# Altium PCB DC_Switch_2.PcbDoc
Units mm, origin at the board's own origin, x right, y up, seen from the top; angles counter-clockwise.
Board outline 75.01 x 101.07 mm, 2 copper layers (Top Layer, Bottom Layer); 24 components, 104 nets, 306 pads, 80 vias.
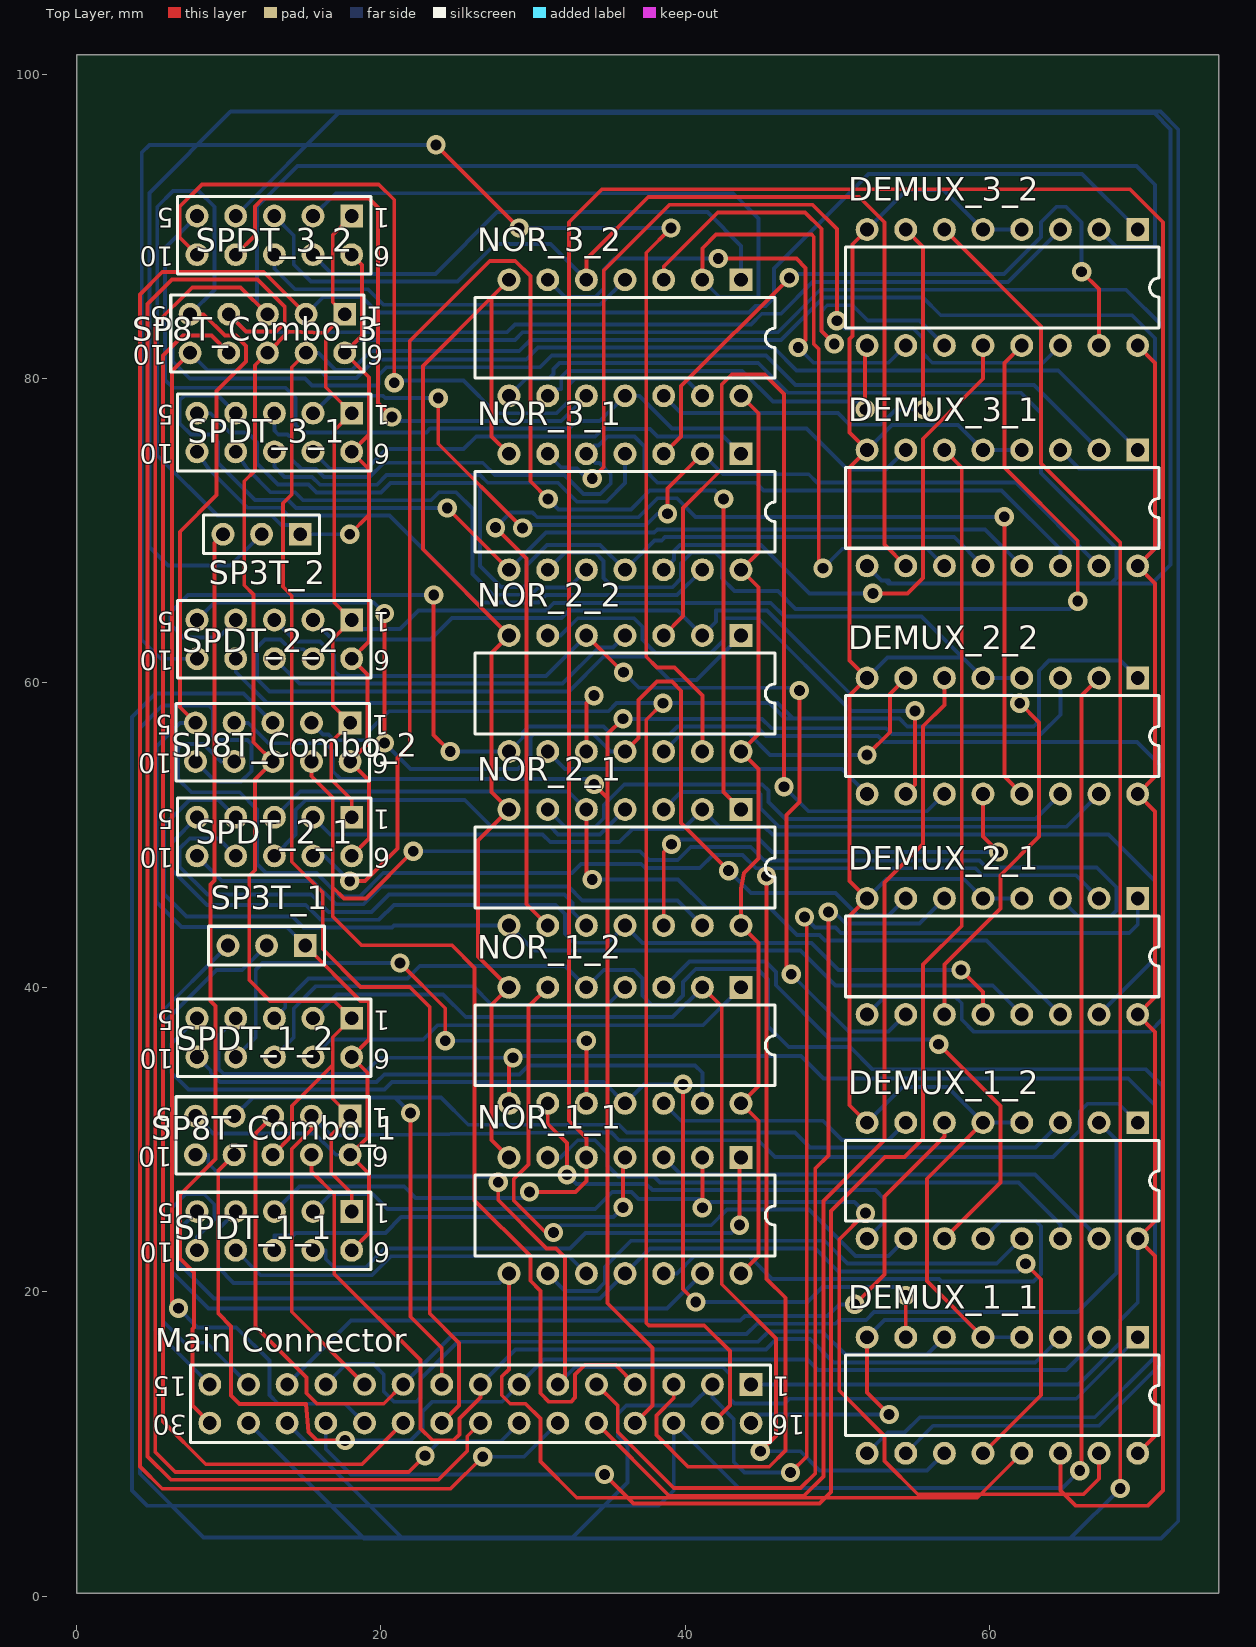
[diagram p0: Top Layer view]
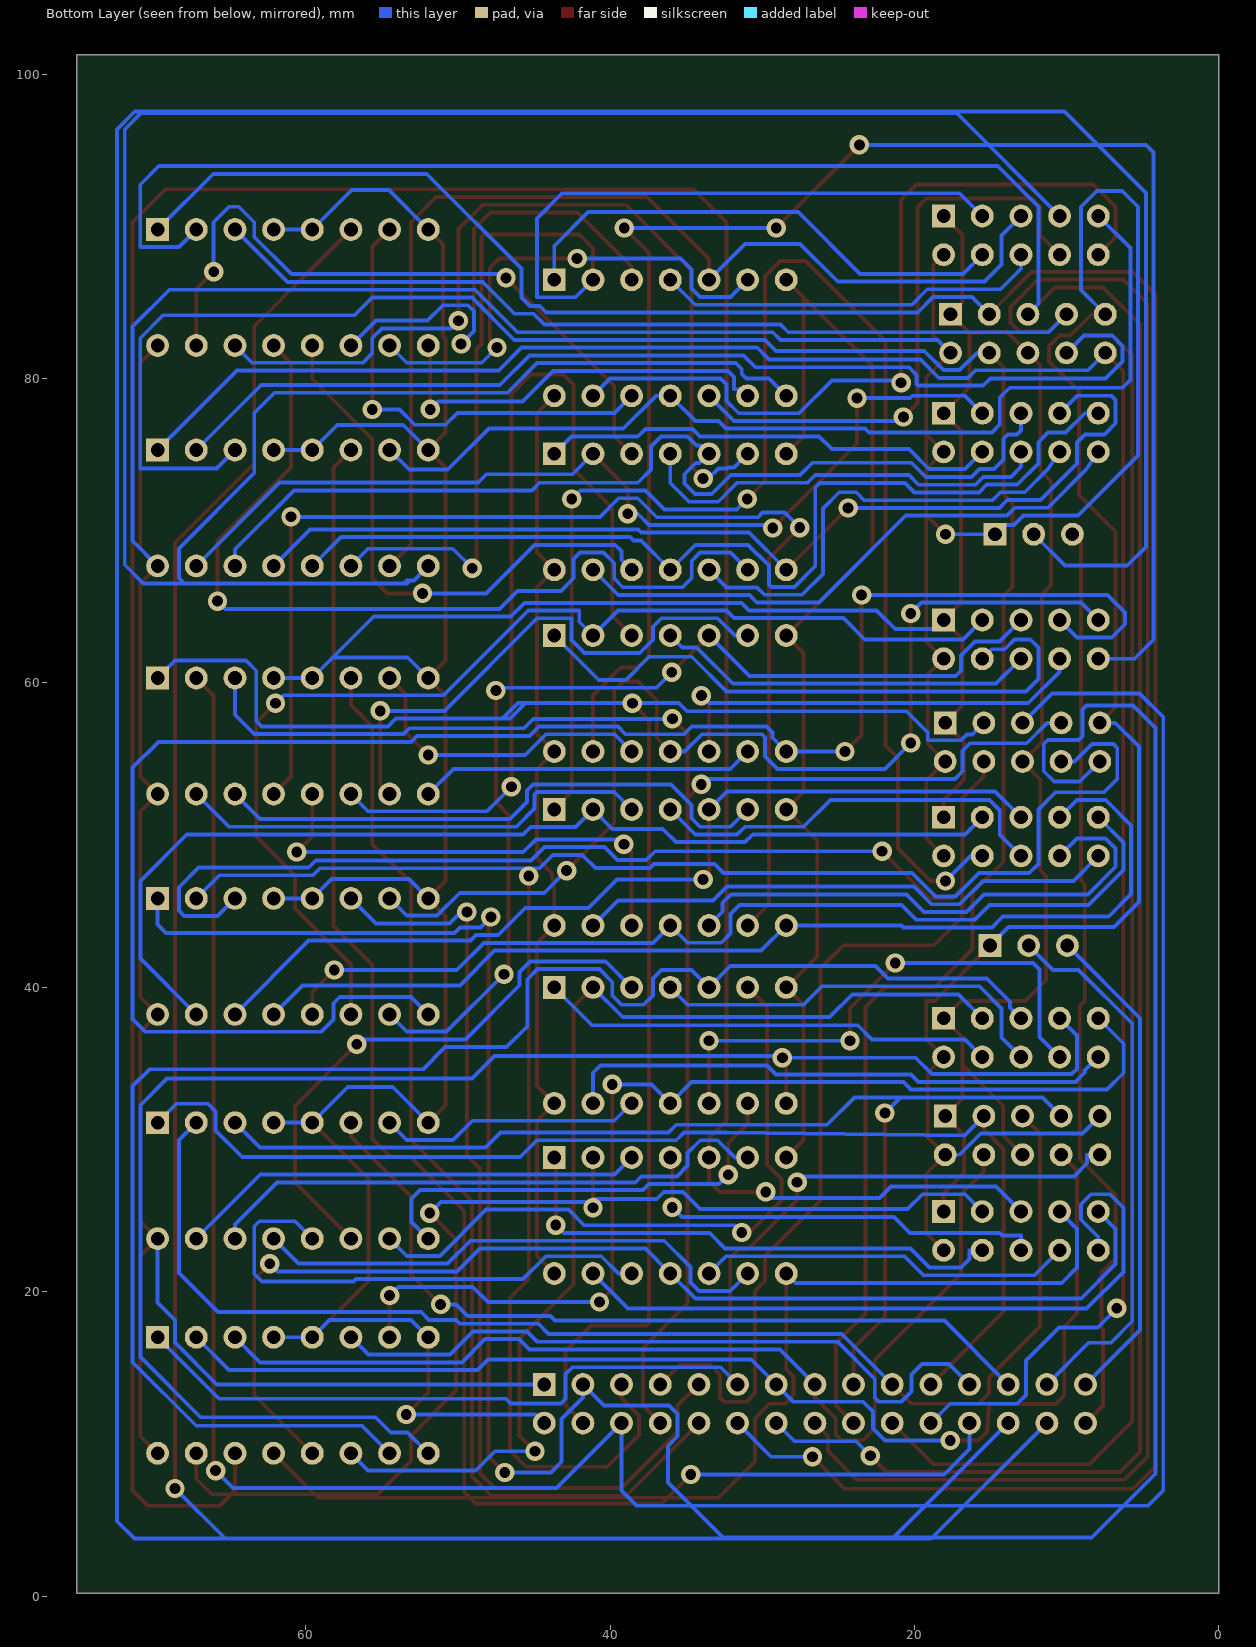
[diagram p1: Bottom Layer view, seen from below]

## Layer stack, top to bottom
Top Solder: solder mask 0.0102, Solder Resist, Dk 3.5
Top Layer: signal copper 0.0356
Dielectric 1: dielectric 0.32, FR-4, Dk 4.8
Bottom Layer: signal copper 0.0356
Bottom Solder: solder mask 0.0102, Solder Resist, Dk 3.5

## Board outline
0.025,0.203 75.032,0.203 75.032,101.27 0.025,101.27

## Design rules (kind name [scope] priority, off if disabled: settings)
Clearance [All] p1: gap=0.254
PolygonConnect [All] p1: connectstyle=Relief reliefconductorwidth=0.254 reliefentries=4 polygonreliefangle="90 Angle" airgapwidth=0.254
RoutingVias [All] p1: holewidth=0.711 width=1.27 viastyle="Through Hole" minholewidth=0.711 minwidth=1.27 maxholewidth=0.711 maxwidth=1.27
SolderMaskExpansion [All] p1: expansion=0.102
Width [All] p1: maxlimit=0.254 minlimit=0.254 preferedwidth=0.254
30 further rules are at their usual default settings.

## Components (designator, comment, footprint, x,y, rotation, side; value= is the part's Value field where it differs from the comment)
DEMUX_1_1 "CD54HCT238" J016D 60.833,13.208 r180 top
DEMUX_1_2 "CD54HCT238" J016D 60.833,27.305 r180 top
DEMUX_2_1 "CD54HCT238" J016D 60.833,42.037 r180 top
DEMUX_2_2 "CD54HCT238" J016D 60.833,56.515 r180 top
DEMUX_3_1 "CD54HCT238" J016D 60.833,71.501 r180 top
DEMUX_3_2 "CD54HCT238" J016D 60.833,85.979 r180 top
"Main Connector" "Arduino Pins" HDR2X15_CEN 44.323,13.919 r180 top
NOR_1_1 "SN74HC02N" N014 36.043,25.019 r180 top
NOR_1_2 "SN74HC02N" N014 36.043,36.195 r180 top
NOR_2_1 "SN74HC02N" N014 36.043,47.879 r180 top
NOR_2_2 "SN74HC02N" N014 36.043,59.309 r180 top
NOR_3_1 "SN74HC02N" N014 36.043,71.247 r180 top
NOR_3_2 "SN74HC02N" N014 36.043,82.677 r180 top
SP3T_1 "Cntrl" HDR1X3 15.037,42.748 r180 top
SP3T_2 "Cntrl" HDR1X3 14.707,69.774 r180 top
SP8T_Combo_1 "Cntrl" HDR2X5_CEN 17.983,31.547 r180 top
SP8T_Combo_2 "Cntrl" HDR2X5_CEN 17.983,57.379 r180 top
SP8T_Combo_3 "Cntrl" HDR2X5_CEN 17.628,84.226 r180 top
SPDT_1_1 "Cntrl" HDR2X5_CEN 18.085,25.273 r180 top
SPDT_1_2 "Cntrl" HDR2X5_CEN 18.085,37.973 r180 top
SPDT_2_1 "Cntrl" HDR2X5_CEN 18.085,51.181 r180 top
SPDT_2_2 "Cntrl" HDR2X5_CEN 18.085,64.135 r180 top
SPDT_3_1 "Cntrl" HDR2X5_CEN 18.085,77.724 r180 top
SPDT_3_2 "Cntrl" HDR2X5_CEN 18.085,90.678 r180 top

## Footprints (in the part's own frame and the unit in brackets; to place one, negate y for a bottom-side part, rotate by r counter-clockwise, add the part's x,y. Pads: shape width x height; smd on the part's side, far side on the other; paste and mask are expansions set on the pad)
HDR1X3 [mm] "Connector; Header; 3 Position"
  rect 1.5x1.5 hole 0.9: 1(0,0)
  round 1.5 hole 0.9: 2(2.54,0) 3(5.08,0)
  silkscreen extent -1.27,-1.27 6.35,1.27
HDR2X5_CEN [mm] "Connector; Header; 5x2 Position"
  rect 1.5x1.5 hole 0.9: 1(0,0)
  round 1.5 hole 0.9: 2(2.54,0) 3(5.08,0) 4(7.62,0) 5(10.16,0) 6(0,2.54) 7(2.54,2.54) 8(5.08,2.54) 9(7.62,2.54) 10(10.16,2.54)
  silkscreen extent -1.27,-1.27 11.43,3.81
HDR2X15_CEN [mm] "Connector; Header; 15x2 Position"
  rect 1.5x1.5 hole 0.9: 1(0,0)
  round 1.5 hole 0.9: 2(2.54,0) 3(5.08,0) 4(7.62,0) 5(10.16,0) 6(12.7,0) 7(15.24,0) 8(17.78,0) 9(20.32,0) 10(22.86,0) 11(25.4,0) 12(27.94,0) 13(30.48,0) 14(33.02,0) 15(35.56,0) 16(0,2.54) 17(2.54,2.54) 18(5.08,2.54) 19(7.62,2.54) 20(10.16,2.54) 21(12.7,2.54) 22(15.24,2.54) 23(17.78,2.54) 24(20.32,2.54) 25(22.86,2.54) 26(25.4,2.54) 27(27.94,2.54) 28(30.48,2.54) 29(33.02,2.54) 30(35.56,2.54)
  silkscreen extent -1.27,-1.27 36.83,3.81
J016D [mm] "DIP; 16 Leads; Row Spacing 7.62 mm; Pitch 2.54 mm"
  rect 1.5x1.5 hole 0.9: 1(-8.89,-3.81)
  round 1.5 hole 0.9: 2(-6.35,-3.81) 3(-3.81,-3.81) 4(-1.27,-3.81) 5(1.27,-3.81) 6(3.81,-3.81) 7(6.35,-3.81) 8(8.89,-3.81) 9(8.89,3.81) 10(6.35,3.81) 11(3.81,3.81) 12(1.27,3.81) 13(-1.27,3.81) 14(-3.81,3.81) 15(-6.35,3.81) 16(-8.89,3.81)
  silkscreen extent -10.3,-2.65 10.3,2.65
N014 [mm] "DIP; 14 Leads; Row Spacing 7.62 mm; Pitch 2.54 mm"
  rect 1.5x1.5 hole 0.9: 1(-7.62,-3.81)
  round 1.5 hole 0.9: 2(-5.08,-3.81) 3(-2.54,-3.81) 4(0,-3.81) 5(2.54,-3.81) 6(5.08,-3.81) 7(7.62,-3.81) 8(7.62,3.81) 9(5.08,3.81) 10(2.54,3.81) 11(0,3.81) 12(-2.54,3.81) 13(-5.08,3.81) 14(-7.62,3.81)
  silkscreen extent -9.85,-2.65 9.85,2.65

## Part data
DEMUX_1_1 DEMUX_1_2 DEMUX_2_1 DEMUX_2_2 DEMUX_3_1 DEMUX_3_2: library part SN54HC238J, "3-Line to 8-Line Decoder / Demultiplexer"
"Main Connector": library part "Header 15X2A", "Header, 15-Pin, Dual row"
NOR_1_1 NOR_1_2 NOR_2_1 NOR_2_2 NOR_3_1 NOR_3_2: "Quadruple 2-Input Positive-NOR Gate"
SP3T_1 SP3T_2: library part "Header 3", "Header, 3-Pin"
SP8T_Combo_1 SP8T_Combo_2 SP8T_Combo_3 SPDT_1_1 SPDT_1_2 SPDT_2_1 SPDT_2_2 SPDT_3_1 SPDT_3_2: library part "Header 5X2A", "Header, 5-Pin, Dual row"

## Via types
v1: diameter 1.27, hole 0.711, Top Layer to Bottom Layer, 80 vias

## Nets (pads, with @x,y where several pads share a name; then routed paths per layer and width w, separated by ;. In a path a pad name is that pad's centre, name@x,y a point inside that pad or via, vN(x,y) a via of type N, cw(c..) or ccw(c..) an arc to the next point about the centre after c; other vN are vias at no path point)
GND: NOR_1_1.7 NOR_1_2.7 NOR_2_1.7 NOR_2_2.7 NOR_3_1.7 NOR_3_2.7 | length 76.7
  Top Layer w0.254: NOR_1_1.7 27.28,29.972 27.28,38.862 NOR_1_2.7 26.391,42.037 26.391,49.657 NOR_2_1.7 27.28,52.832 27.28,61.976 NOR_2_2.7 22.758,68.783 22.758,80.823 27.28,85.344 ; NOR_3_1.7 27.28,76.2 27.28,85.344 ; NOR_3_2.7 27.28,85.344
NetDEMUX_1_1_1: "Main Connector.6" DEMUX_1_1.1 SP8T_Combo_1.10 | length 78.9
  Top Layer w0.254: v1(27.711,27.203) 27.711,26.035 30.886,22.86 31.496,22.86 32.106,22.25 32.106,14.402 31.623,13.919
  Bottom Layer w0.254: SP8T_Combo_1.10 8.661,29.007 8.661,28.448 9.525,27.584 27.33,27.584 v1(27.711,27.203) ; 31.623,13.919 32.754,15.05 42.469,15.05 42.926,14.593 42.926,12.979 43.231,12.675 46.533,12.675 46.838,12.979 65.684,12.979 DEMUX_1_1.1
NetDEMUX_1_1_2: "Main Connector.7" DEMUX_1_1.2 SP8T_Combo_1.9 | length 79.8
  Top Layer w0.254: SP8T_Combo_1.9 9.322,27.965 9.322,18.567 10.16,17.729 10.16,13.183 10.719,12.624 15.088,12.624 15.24,10.795 15.799,10.236 v1(17.653,10.236)
  Bottom Layer w0.254: v1(17.653,10.236) 21.946,10.236 22.733,11.024 22.733,12.141 23.368,12.776 27.94,12.776 29.083,13.919 30.722,15.558 48.018,15.558 48.717,14.859 65.024,14.859 DEMUX_1_1.2
NetDEMUX_1_1_3: "Main Connector.8" DEMUX_1_1.3 SP8T_Combo_1.7 | length 68.5
  Top Layer w0.254: SP8T_Combo_1.7 15.443,27.915 16.942,26.416 16.942,21.184 22.606,15.519 22.606,11.024 23.381,10.248 24.777,10.248 25.169,10.64 25.169,11.681 26.543,13.056 26.543,13.919
  Bottom Layer w0.254: 26.543,13.919 28.842,16.218 45.301,16.218 45.974,16.891 48.209,16.891 49.733,15.367 62.992,15.367 DEMUX_1_1.3
NetDEMUX_1_1_4: "Main Connector.16" DEMUX_1_1.4 DEMUX_1_1.5 DEMUX_1_1.8 DEMUX_1_2.4 DEMUX_1_2.5 DEMUX_1_2.8 DEMUX_2_1.4 DEMUX_2_1.5 DEMUX_2_1.8 DEMUX_2_2.4 DEMUX_2_2.5 DEMUX_2_2.8 DEMUX_3_1.4 DEMUX_3_1.5 DEMUX_3_1.8 DEMUX_3_2.4 DEMUX_3_2.5 DEMUX_3_2.8 SP8T_Combo_1.1 SP8T_Combo_1.8 SP8T_Combo_2.1 SP8T_Combo_2.8 SP8T_Combo_3.1 SP8T_Combo_3.8 SPDT_1_1.1 SPDT_1_2.1 SPDT_2_1.1 SPDT_2_2.1 SPDT_3_1.1 SPDT_3_2.1 | length 329.3
  Top Layer w0.254: SP8T_Combo_1.8 14.167,30.27 14.167,32.226 16.84,34.9 ; SPDT_1_1.1 18.085,26.467 16.739,27.813 16.739,30.302 SP8T_Combo_1.1 16.84,32.69 16.84,34.9 ; SPDT_2_1.1 18.085,52.324 16.739,53.67 16.739,56.134 SP8T_Combo_2.1 16.84,58.522 16.84,62.89 SPDT_2_2.1 16.942,65.278 16.942,76.581 SPDT_3_1.1 16.383,79.426 16.383,82.982 ; SPDT_3_2.1 16.84,89.433 16.84,85.014 SP8T_Combo_3.1 16.383,82.982 ; DEMUX_1_1.8 51.943,13.386 v1(53.391,11.938) ; DEMUX_1_2.8 50.8,32.258 50.8,44.704 DEMUX_2_1.8 50.8,46.99 50.8,59.182 DEMUX_2_2.8 50.8,61.468 50.8,74.168 DEMUX_3_1.8 50.8,76.454 50.8,82.608 50.978,82.786 50.978,88.824 DEMUX_3_2.8 ; DEMUX_1_1.5 55.88,20.701 55.88,27.432 DEMUX_1_2.5 ; 16.383,82.982 13.945,83.083 SP8T_Combo_3.8 11.735,80.874 11.735,73.965 11.024,73.254 11.024,66.421 11.633,65.811 11.633,56.109 SP8T_Combo_2.8 11.735,53.67 11.735,47.701 11.354,47.32 11.354,40.488 12.725,39.116 16.942,39.116 SPDT_1_2.1 16.84,36.728 16.84,34.9
  Bottom Layer w0.254: SPDT_2_2.1 18.708,64.135 18.708,63.547 21.26,63.547 22.483,64.77 30.86,64.77 31.356,65.266 45.617,65.266 46.519,64.364 55.524,64.364 58.217,61.671 ; 44.323,11.379 44.882,11.938 v1(53.391,11.938) ; DEMUX_1_1.8 53.086,18.161 58.42,18.161 DEMUX_1_1.5 DEMUX_1_1.4 ; DEMUX_1_2.8 54.278,33.45 57.228,33.45 DEMUX_1_2.5 DEMUX_1_2.4 ; DEMUX_2_1.8 53.213,47.117 58.293,47.117 DEMUX_2_1.5 DEMUX_2_1.4 ; DEMUX_2_2.8 53.289,61.671 58.217,61.671 ; DEMUX_3_1.8 53.582,76.95 57.924,76.95 DEMUX_3_1.5 DEMUX_3_1.4 ; DEMUX_3_2.8 54.534,92.38 56.972,92.38 DEMUX_3_2.5 DEMUX_3_2.4 ; DEMUX_2_2.4 DEMUX_2_2.5 58.217,61.671
NetDEMUX_1_1_6: "Main Connector.12" DEMUX_1_1.6 | length 46.6
  Bottom Layer w0.254: 16.383,13.919 17.729,15.265 19.507,15.265 20.193,14.58 20.193,13.462 20.879,12.776 22.327,12.776 22.606,13.056 22.606,14.275 25.057,16.726 44.793,16.726 45.466,17.399 48.997,17.399 50.521,15.875 55.88,15.875 DEMUX_1_1.6
NetDEMUX_1_1_7: DEMUX_1_1.7 NOR_1_2.11 SPDT_1_2.5 | length 71.5
  Top Layer w0.254: v1(39.853,33.63) 39.853,20.168 v1(40.691,19.329) ; DEMUX_1_1.7 v1(54.483,19.761)
  Bottom Layer w0.254: SPDT_1_2.5 6.248,36.297 6.248,34.392 7.354,33.286 20.232,33.286 20.728,33.782 34.646,33.782 NOR_1_2.11 37.287,33.63 v1(39.853,33.63) ; v1(40.691,19.329) 48.025,19.329 49.022,20.327 53.918,20.327 v1(54.483,19.761)
NetDEMUX_1_1_9: DEMUX_1_1.9 NOR_1_2.8 SPDT_1_2.4 | length 108.5
  Top Layer w0.254: NOR_1_2.8 28.423,35.128 v1(28.677,35.382) v1@28.778,35.484
  Bottom Layer w0.254: SPDT_1_2.4 9.334,36.842 9.334,34.646 9.677,34.302 18.859,34.302 19.939,35.382 v1(28.677,35.382) ; v1@28.778,35.484 47.6,35.484 49.073,34.011 69.101,34.011 70.854,32.258 70.854,15.711 66.904,11.76 55.408,11.76 54.408,10.76 53.305,10.76 DEMUX_1_1.9
NetDEMUX_1_1_10: DEMUX_1_1.10 NOR_1_2.5 SPDT_1_2.3 | length 106.6
  Bottom Layer w0.254: SPDT_1_2.3 13.72,38.688 13.72,39.057 15.252,40.589 21.742,40.589 22.555,41.402 32.106,41.402 NOR_1_2.5 34.646,41.148 36.627,41.148 37.186,40.589 37.186,39.472 37.795,38.862 39.243,38.862 39.853,39.472 39.853,40.361 40.691,41.199 44.755,41.199 45.441,40.513 45.441,37.44 46.8,36.08 50.839,36.08 52.299,34.62 70.256,34.62 71.362,33.515 71.362,15.379 67.184,11.201 56.286,11.201 DEMUX_1_1.10
NetDEMUX_1_1_11: DEMUX_1_1.11 NOR_1_2.2 SPDT_1_2.2 | length 73.6
  Top Layer w0.254: NOR_1_2.2 42.393,38.735 42.393,20.498 45.949,16.942 45.949,10.541 v1(44.933,9.525)
  Bottom Layer w0.254: SPDT_1_2.2 17.114,39.543 24.084,39.543 25.578,38.049 39.167,38.049 NOR_1_2.2 ; v1(44.933,9.525) 47.562,9.525 48.82,8.267 55.892,8.267 DEMUX_1_1.11
NetDEMUX_1_1_12: DEMUX_1_1.12 NOR_1_1.11 SPDT_1_1.5 | length 77.1
  Top Layer w0.254: DEMUX_1_1.12 63.373,13.208 63.373,20.828 v1(62.357,21.844)
  Bottom Layer w0.254: SPDT_1_1.5 6.782,24.13 6.782,21.819 9.042,19.558 34.392,19.558 NOR_1_1.11 37.682,22.848 48.551,22.848 50.051,21.348 61.861,21.348 v1(62.357,21.844)
NetDEMUX_1_1_13: DEMUX_1_1.13 NOR_1_1.8 SPDT_1_1.4 | length 71.9
  Top Layer w0.254: NOR_1_1.8 28.423,14.91 27.94,14.427 27.94,13.208 28.499,12.649 29.515,12.649 30.48,11.684 30.48,8.865 32.868,6.477 59.182,6.477 DEMUX_1_1.13
  Bottom Layer w0.254: SPDT_1_1.4 9.322,24.13 9.322,21.59 10.326,20.586 27.8,20.586 NOR_1_1.8
NetDEMUX_1_1_14: DEMUX_1_1.14 NOR_1_1.5 SPDT_1_1.3 | length 219.5
  Top Layer w0.254: v1(29.769,26.568) 32.791,26.568 33.503,27.28 NOR_1_1.5 33.503,30.099 32.36,31.242 32.36,90.272 34.526,92.438 69.208,92.438 71.374,90.272 71.374,6.96 70.358,5.944 65.659,5.944 64.643,6.96 DEMUX_1_1.14
  Bottom Layer w0.254: SPDT_1_1.3 14.656,26.924 21.539,26.924 22.285,26.178 29.378,26.178 v1(29.769,26.568)
NetDEMUX_1_1_15: DEMUX_1_1.15 NOR_1_1.2 SPDT_1_1.2 | length 77.5
  Top Layer w0.254: v1(41.123,25.527) NOR_1_1.2 ; v1(51.841,25.171) 50.114,23.444 50.114,13.513 53.086,10.541 53.086,8.89 55.27,6.706 66.167,6.706 67.183,7.722 DEMUX_1_1.15
  Bottom Layer w0.254: SPDT_1_1.2 16.688,26.416 19.482,26.416 20.447,25.451 34.087,25.451 35.204,26.568 36.474,26.568 36.932,26.111 41.123,26.111 v1(41.123,25.527) 41.504,25.908 51.105,25.908 v1(51.841,25.171)
NetDEMUX_1_1_16: "Main Connector.1" DEMUX_1_1.16 DEMUX_1_2.16 DEMUX_2_1.16 DEMUX_2_2.16 DEMUX_3_1.16 DEMUX_3_2.16 SP3T_1.1 SP3T_2.1 SP8T_Combo_1.5 SP8T_Combo_1.6 SP8T_Combo_2.5 SP8T_Combo_2.6 SP8T_Combo_3.5 SP8T_Combo_3.6 SPDT_1_1.6 SPDT_1_2.6 SPDT_2_1.6 SPDT_2_2.6 SPDT_3_1.6 SPDT_3_2.6 | length 366.5
  Top Layer w0.254: SP8T_Combo_3.5 8.357,84.226 9.766,82.817 10.477,82.817 11.151,82.144 11.151,81.128 9.195,79.172 9.195,72.339 6.794,69.938 6.794,58.408 SP8T_Combo_2.5 ; SP3T_1.1 18.669,39.116 19.228,39.116 19.228,36.576 SPDT_1_2.6 19.126,34.392 19.126,30.15 SP8T_Combo_1.6 19.228,27.762 19.228,23.876 SPDT_1_1.6 ; v1(17.958,69.774) 19.228,71.044 ; SPDT_2_1.6 19.228,49.784 19.228,53.594 SP8T_Combo_2.6 19.126,55.982 19.126,60.554 SPDT_2_2.6 19.228,62.738 19.228,71.044 ; SPDT_3_2.6 18.771,87.452 18.771,82.829 SP8T_Combo_3.6 19.228,80.086 19.228,76.327 ; DEMUX_1_1.16 70.866,10.541 70.866,22.352 DEMUX_1_2.16 70.866,24.638 70.866,37.084 DEMUX_2_1.16 70.866,39.37 70.866,51.562 DEMUX_2_2.16 70.866,53.848 70.866,66.548 DEMUX_3_1.16 70.866,68.834 70.866,81.026 DEMUX_3_2.16 ; 19.228,71.044 19.228,74.041 ; 19.228,74.041 19.228,76.327 ; 19.228,74.041 SPDT_3_1.6 19.228,76.327
  Bottom Layer w0.254: SP8T_Combo_3.5 9.068,85.827 9.068,91.288 8.026,92.329 6.35,92.329 5.309,91.288 5.309,74.955 9.259,71.005 12.834,71.005 13.456,70.383 14.097,70.383 SP3T_2.1 v1(17.958,69.774) ; SP8T_Combo_1.5 8.966,30.404 15.646,30.404 17.043,29.007 SP8T_Combo_1.6 ; SP8T_Combo_2.5 6.807,57.379 5.258,55.829 5.258,45.604 6.894,43.967 13.818,43.967 SP3T_1.1 ; SP8T_Combo_3.6 18.479,82.538 28.804,82.538 29.312,83.046 46.08,83.046 48.867,85.834 68.954,85.834 71.374,83.414 71.374,69.342 DEMUX_3_1.16 ; 44.323,13.919 65.837,13.919 68.58,16.662 68.58,18.161 69.723,19.304 DEMUX_1_2.16
NetDEMUX_1_2_1: "Main Connector.11" DEMUX_1_2.1 SP8T_Combo_1.2 | length 78.3
  Top Layer w0.254: SP8T_Combo_1.2 15.443,30.683 14.148,29.388 14.148,18.694 18.923,13.919
  Bottom Layer w0.254: SP8T_Combo_1.2 16.713,30.277 32.372,30.468 35.142,30.468 35.65,29.96 44.794,29.96 45.899,28.854 64.16,28.854 65.913,30.607 65.913,31.852 66.421,32.36 68.478,32.36 DEMUX_1_2.1
NetDEMUX_1_2_2: "Main Connector.10" DEMUX_1_2.2 SP8T_Combo_1.3 | length 87.5
  Top Layer w0.254: SP8T_Combo_1.3 11.76,30.404 11.76,17.729 15.113,14.376 15.113,13.335 15.799,12.649 20.193,12.649 21.463,13.919
  Bottom Layer w0.254: 21.463,13.919 24.778,17.234 44.031,17.234 44.704,17.907 49.86,17.907 50.114,18.161 51.892,18.161 52.4,18.669 65.761,18.669 68.326,21.234 68.326,29.972 DEMUX_1_2.2
NetDEMUX_1_2_3: "Main Connector.9" DEMUX_1_2.3 SP8T_Combo_1.4 | length 77
  Top Layer w0.254: v1(21.946,31.75) 21.946,18.364 24.003,16.307 24.003,13.919
  Bottom Layer w0.254: SP8T_Combo_1.4 11.594,32.778 20.918,32.778 ; v1(21.946,31.75) 20.918,32.778 ; DEMUX_1_2.3 63.004,29.476 48.188,29.476 47.196,30.468 36.158,30.468 35.65,30.976 25.742,30.976 23.94,32.778 20.918,32.778
NetDEMUX_1_2_6: "Main Connector.13" DEMUX_1_2.6 | length 53.8
  Top Layer w0.254: v1(51.13,19.177) 53.086,21.133 53.086,26.276 57.023,30.213 DEMUX_1_2.6
  Bottom Layer w0.254: 13.843,13.919 18.034,18.11 43.612,18.11 43.917,18.415 49.352,18.415 50.114,19.177 v1(51.13,19.177)
NetDEMUX_1_2_7: DEMUX_1_2.7 NOR_1_2.12 | length 17.4
  Bottom Layer w0.254: NOR_1_2.12 39.726,31.242 49.047,31.242 50.305,29.984 53.352,29.984 DEMUX_1_2.7
NetDEMUX_1_2_9: DEMUX_1_2.9 NOR_1_2.9 | length 29.8
  Top Layer w0.254: NOR_1_2.9 30.963,31.039 32.233,29.769 v1(32.233,27.698)
  Bottom Layer w0.254: v1(32.233,27.698) 32.854,27.076 37.44,27.076 37.834,26.682 52.493,26.682 53.035,26.14 53.035,24.587 DEMUX_1_2.9
NetDEMUX_1_2_10: DEMUX_1_2.10 NOR_1_2.6 | length 43.9
  Top Layer w0.254: NOR_1_2.6 29.693,38.735 29.693,28.372 28.727,27.407 28.727,26.01 30.836,23.901 v1(31.344,23.901)
  Bottom Layer w0.254: v1(31.344,23.901) 31.814,24.372 41.707,24.372 42.735,25.4 48.138,25.4 51.174,22.364 53.352,22.364 DEMUX_1_2.10
NetDEMUX_1_2_11: DEMUX_1_2.11 NOR_1_2.3 | length 37.5
  Top Layer w0.254: v1(56.642,36.271) 60.706,32.207 60.706,27.178 DEMUX_1_2.11
  Bottom Layer w0.254: NOR_1_2.3 40.284,41.707 45.263,41.707 45.949,41.021 45.949,40.142 49.502,36.588 56.325,36.588 v1(56.642,36.271)
NetDEMUX_1_2_12: DEMUX_1_2.12 NOR_1_1.12 | length 33.7
  Bottom Layer w0.254: NOR_1_1.12 39.446,21.209 40.577,22.34 44.208,22.34 45.708,20.84 56.681,20.84 56.845,20.676 62.865,20.676 63.373,21.184 63.373,24.308 63.043,24.638 60.706,24.638 DEMUX_1_2.12
NetDEMUX_1_2_13: DEMUX_1_2.13 NOR_1_1.9 | length 34.9
  Bottom Layer w0.254: NOR_1_1.9 32.106,20.066 34.163,20.066 34.709,20.612 34.709,21.628 36.437,23.356 49.166,23.356 50.666,21.856 60.464,21.856 DEMUX_1_2.13
NetDEMUX_1_2_14: DEMUX_1_2.14 NOR_1_1.6 | length 37.9
  Bottom Layer w0.254: NOR_1_1.6 31.801,28.829 32.932,29.96 34.073,29.96 34.9,29.134 34.9,28.296 35.611,27.584 37.948,27.584 38.342,27.19 61.888,27.19 64.643,24.435 DEMUX_1_2.14
NetDEMUX_1_2_15: DEMUX_1_2.15 NOR_1_1.3 | length 30.8
  Bottom Layer w0.254: NOR_1_1.3 39.714,27.698 62.98,27.698 DEMUX_1_2.15
NetDEMUX_2_1_1: "Main Connector.2" DEMUX_2_1.1 SP8T_Combo_2.10 | length 183.3
  Top Layer w0.254: v1(46.914,8.128) 47.981,9.195 47.981,44.475 v1(47.828,44.628)
  Bottom Layer w0.254: SP8T_Combo_2.10 9.144,53.518 10.82,53.518 11.506,54.204 11.506,55.982 11.24,56.248 9.22,56.248 8.966,56.502 8.966,58.268 8.712,58.522 5.639,58.522 4.166,57.048 4.166,8.052 8.357,3.861 32.588,3.861 36.195,7.468 36.195,9.881 35.56,10.516 35.56,11.963 36.119,12.522 40.386,12.522 41.783,13.919 41.783,13.056 43.18,11.659 43.18,8.839 43.891,8.128 v1(46.914,8.128) ; v1(47.828,44.628) 48.514,43.942 49.86,43.942 50.216,43.586 69.164,43.586 69.723,44.145 DEMUX_2_1.1
NetDEMUX_2_1_2: "Main Connector.3" DEMUX_2_1.2 SP8T_Combo_2.9 | length 127.2
  Top Layer w0.254: 39.243,13.919 39.243,13.03 38.1,11.887 38.1,10.592 40.183,8.509 45.517,8.509 46.584,9.576 46.584,19.609 45.339,20.853 v1(45.339,47.32)
  Bottom Layer w0.254: SP8T_Combo_2.9 9.486,54.839 8.343,55.982 6.934,55.982 6.68,55.728 6.68,53.696 7.556,52.82 10.731,52.82 11.862,51.689 11.862,48.108 12.459,47.51 15.761,47.51 17.297,45.974 18.618,45.974 20.154,47.51 32.549,47.51 33.147,48.108 37.108,48.108 37.378,47.838 40.952,47.838 41.825,48.711 43.762,48.711 44.644,47.828 45.847,47.828 ; v1(45.339,47.32) 45.847,47.828 ; DEMUX_2_1.2 65.659,47.371 59.512,47.371 59.055,47.828 45.847,47.828
NetDEMUX_2_1_3: "Main Connector.4" DEMUX_2_1.3 SP8T_Combo_2.7 | length 120.7
  Top Layer w0.254: SP8T_Combo_2.7 15.443,53.873 16.84,52.476 16.84,46.584 ; v1(22.123,48.946) 19.025,45.847 17.577,45.847 16.84,46.584 ; 36.703,13.919 35.408,15.215 33.401,15.215 32.766,14.58 32.766,13.056 32.487,12.776 31.039,12.776 30.48,13.335 30.48,20.066 29.82,20.726 29.82,22.352 26.162,26.01 26.162,41.275 24.663,42.774 18.72,42.774 16.84,44.653 16.84,46.584
  Bottom Layer w0.254: v1(22.123,48.946) 37.033,48.946 37.617,48.362 39.504,48.362 40.361,49.219 44.304,49.219 45.187,48.336 59.334,48.336 59.792,47.879 67.031,47.879 68.326,46.584 68.326,45.06 67.97,44.704 65.786,44.704 DEMUX_2_1.3
NetDEMUX_2_1_6: "Main Connector.5" DEMUX_2_1.6 | length 64.5
  Top Layer w0.254: 34.163,13.919 35.56,12.522 35.56,10.795 39.243,7.112 47.574,7.112 48.539,8.077 48.539,28.092 49.403,28.956 v1(49.403,44.958)
  Bottom Layer w0.254: v1(49.403,44.958) 49.79,44.958 50.54,44.208 55.384,44.208 DEMUX_2_1.6
NetDEMUX_2_1_7: DEMUX_2_1.7 NOR_2_2.11 SPDT_2_2.5 | length 74
  Top Layer w0.254: v1(20.244,56.058) v1(20.244,64.567) ; NOR_2_2.11 36.932,56.388 36.932,58.877 38.151,60.096 39.116,60.096 39.726,59.487 39.726,50.8 v1(42.85,47.676)
  Bottom Layer w0.254: SPDT_2_2.5 9.068,65.278 19.533,65.278 v1(20.244,64.567) ; v1(20.244,56.058) 21.946,54.356 29.007,54.356 29.832,55.181 29.832,56.439 30.023,56.63 33.971,56.63 35.102,55.499 NOR_2_2.11 ; v1(42.85,47.676) 44.323,46.203 49.872,46.203 51.359,44.716 53.352,44.716 DEMUX_2_1.7
NetDEMUX_2_1_9: DEMUX_2_1.9 NOR_2_2.8 SPDT_2_2.4 | length 122
  Top Layer w0.254: v1(23.47,65.786) 23.47,56.591 v1(24.562,55.499)
  Bottom Layer w0.254: SPDT_2_2.4 9.322,62.992 7.036,62.992 6.172,63.856 6.172,64.631 7.327,65.786 v1(23.47,65.786) ; v1(24.562,55.499) NOR_2_2.8 29.324,56.4 29.324,56.744 29.718,57.138 34.634,57.138 35.142,56.63 38.976,56.63 39.484,57.138 44.685,57.138 45.302,56.522 52.673,56.522 53.061,56.134 69.672,56.134 71.362,54.444 71.362,37.936 70.51,37.084 58.979,37.084 58.166,37.897 58.166,38.964 57.76,39.37 53.086,39.37 DEMUX_2_1.9
NetDEMUX_2_1_10: DEMUX_2_1.10 NOR_2_2.5 SPDT_2_2.3 | length 67.9
  Top Layer w0.254: NOR_2_2.5 35.916,60.706 v1(35.941,60.706) ; v1(46.965,40.869) 46.66,41.173 46.66,51.333 47.498,52.172 v1(47.498,59.512)
  Bottom Layer w0.254: SPDT_2_2.3 14.414,62.726 16.013,62.726 16.942,61.798 16.942,60.808 17.285,60.464 30.848,60.464 NOR_2_2.5 ; v1(35.941,60.706) 36.957,59.69 47.32,59.69 v1(47.498,59.512) ; v1(46.965,40.869) 50.737,37.096 53.352,37.096 DEMUX_2_1.10
NetDEMUX_2_1_11: DEMUX_2_1.11 NOR_2_2.2 SPDT_2_2.2 | length 75.6
  Top Layer w0.254: DEMUX_2_1.11 57.023,41.504 60.706,45.187 60.706,47.371 63.246,49.911 63.246,57.404 v1(61.976,58.674)
  Bottom Layer w0.254: SPDT_2_2.2 16.815,62.865 23.266,62.865 24.663,64.262 31.864,64.262 32.36,64.758 39.484,64.758 NOR_2_2.2 42.024,64.02 42.024,64.758 45.376,64.758 50.94,59.194 61.456,59.194 v1(61.976,58.674)
NetDEMUX_2_1_12: DEMUX_2_1.12 NOR_2_1.11 SPDT_2_1.5 | length 64.7
  Top Layer w0.254: v1(58.115,41.148) 59.563,39.7 DEMUX_2_1.12
  Bottom Layer w0.254: SPDT_2_1.5 6.274,49.53 6.274,47.713 8.571,45.415 15.062,45.415 16.027,44.45 19.888,44.45 20.853,45.415 31.493,45.415 32.094,44.815 32.094,43.536 32.691,42.938 34.912,42.938 NOR_2_1.11 37.186,42.926 48.291,42.926 50.069,41.148 v1(58.115,41.148)
NetDEMUX_2_1_13: DEMUX_2_1.13 NOR_2_1.8 SPDT_2_1.4 | length 70.1
  Bottom Layer w0.254: SPDT_2_1.4 9.334,52.312 7.43,52.312 5.766,50.648 5.766,46.126 7.239,44.653 14.199,44.653 14.91,43.942 20.726,43.942 20.853,44.069 NOR_2_1.8 30.074,42.418 47.582,42.418 49.868,40.132 60.198,40.132 DEMUX_2_1.13
NetDEMUX_2_1_14: DEMUX_2_1.14 NOR_2_1.5 SPDT_2_1.3 | length 60.9
  Top Layer w0.254: NOR_2_1.5 33.503,47.473 v1(33.884,47.092)
  Bottom Layer w0.254: SPDT_2_1.3 14.707,52.883 32.309,52.883 NOR_2_1.5 ; v1(33.884,47.092) 39.532,47.092 41.411,45.212 45.568,45.212 47.346,43.434 48.812,43.434 49.174,43.071 59.799,43.071 DEMUX_2_1.14
NetDEMUX_2_1_15: DEMUX_2_1.15 NOR_2_1.2 SPDT_2_1.2 | length 69.1
  Bottom Layer w0.254: SPDT_2_1.2 16.676,50.05 30.621,50.05 31.129,49.542 35.662,49.542 36.539,50.419 39.853,50.419 NOR_2_1.2 42.266,50.546 45.212,50.546 45.72,50.038 67.806,50.038 70.854,46.99 70.854,41.898 DEMUX_2_1.15
NetDEMUX_2_2_1: "Main Connector.17" DEMUX_2_2.1 SP8T_Combo_2.2 | length 115.5
  Top Layer w0.254: v1(38.532,58.674) 37.44,57.582 37.44,17.958 37.617,17.78 41.25,17.78 42.926,16.104 42.926,12.522 41.783,11.379
  Bottom Layer w0.254: SP8T_Combo_2.2 16.205,56.617 16.561,56.617 16.942,56.236 19.126,56.236 19.126,56.744 20.523,58.141 34.95,58.141 35.484,58.674 v1(38.532,58.674) 45.542,58.674 ; DEMUX_2_2.1 68.58,61.468 63.906,61.468 63.246,60.808 63.246,57.506 62.89,57.15 54.585,57.15 54.077,57.658 47.066,57.658 ; 45.542,58.674 46.05,58.674 47.066,57.658 ; 45.542,58.674 46.558,57.658 47.066,57.658
NetDEMUX_2_2_2: "Main Connector.18" DEMUX_2_2.2 SP8T_Combo_2.3 | length 183.8
  Top Layer w0.254: v1(65.913,8.255) 66.04,8.382 66.04,59.182 DEMUX_2_2.2
  Bottom Layer w0.254: SP8T_Combo_2.3 10.973,59.309 5.207,59.309 3.658,57.76 3.658,6.96 4.674,5.944 38.227,5.944 39.243,6.96 39.243,11.379 43.51,7.112 64.77,7.112 v1(65.913,8.255)
NetDEMUX_2_2_3: "Main Connector.19" DEMUX_2_2.3 SP8T_Combo_2.4 | length 107.8
  Top Layer w0.254: v1(34.011,53.34) 34.9,52.451 ; v1(35.904,57.646) 34.9,56.642 34.9,52.451 ; 36.703,11.379 37.846,12.522 37.846,16.307 34.9,19.253 34.9,52.451
  Bottom Layer w0.254: SP8T_Combo_2.4 11.287,57.379 12.622,56.044 16.344,56.044 16.84,55.548 16.84,54.204 17.348,53.696 33.655,53.696 v1(34.011,53.34) ; v1(35.904,57.646) 45.046,57.646 45.663,57.03 53.181,57.03 53.569,56.642 63.373,56.642 64.643,57.912 DEMUX_2_2.3
NetDEMUX_2_2_6: "Main Connector.20" DEMUX_2_2.6 | length 73.2
  Top Layer w0.254: 34.163,11.379 38.938,6.604 47.803,6.604 49.073,7.874 49.073,25.959 53.086,29.972 53.086,46.888 55.626,49.428 55.626,57.162 57.023,58.559 DEMUX_2_2.6
NetDEMUX_2_2_7: DEMUX_2_2.7 NOR_2_2.12 | length 20.5
  Top Layer w0.254: v1(51.943,55.27) 53.441,56.768 53.441,59.283 DEMUX_2_2.7
  Bottom Layer w0.254: NOR_2_2.12 39.714,56.63 44.208,56.63 45.568,55.27 v1(51.943,55.27)
NetDEMUX_2_2_9: DEMUX_2_2.9 NOR_2_2.9 | length 22.1
  Bottom Layer w0.254: NOR_2_2.9 32.106,54.356 50.292,54.356 DEMUX_2_2.9
NetDEMUX_2_2_10: DEMUX_2_2.10 NOR_2_2.6 | length 36
  Top Layer w0.254: DEMUX_2_2.10 55.093,53.315 v1(55.093,58.166)
  Bottom Layer w0.254: NOR_2_2.6 31.801,63.119 32.932,64.25 36.627,64.25 37.186,63.691 37.186,62.84 38.049,61.976 41.681,61.976 42.532,62.826 42.532,64.25 44.794,64.25 50.878,58.166 v1(55.093,58.166)
NetDEMUX_2_2_11: DEMUX_2_2.11 NOR_2_2.3 | length 60.4
  Top Layer w0.254: NOR_2_2.3 39.853,64.389 39.853,71.501 42.393,74.041 42.393,79.604 43.053,80.264 45.212,80.264 46.482,78.994 v1(46.482,53.188)
  Bottom Layer w0.254: v1(46.482,53.188) 48.096,51.574 55.892,51.574 DEMUX_2_2.11
NetDEMUX_2_2_12: DEMUX_2_2.12 NOR_2_1.12 | length 31.7
  Top Layer w0.254: NOR_2_1.12 38.583,48.895 v1(39.091,49.403) ; DEMUX_2_2.12 59.563,49.911 v1(60.579,48.895)
  Bottom Layer w0.254: v1(39.091,49.403) 39.414,49.727 44.873,49.727 45.704,48.895 v1(60.579,48.895)
NetDEMUX_2_2_13: DEMUX_2_2.13 NOR_2_1.9 | length 81.2
  Top Layer w0.254: v1(27.534,70.206) 29.566,68.174 29.566,45.466 NOR_2_1.9 ; v1(60.96,70.917) 60.96,53.848 DEMUX_2_2.13
  Bottom Layer w0.254: v1(27.534,70.206) 28.524,71.196 29.972,71.196 30.277,70.891 36.932,70.891 38.176,72.136 39.446,72.136 40.665,70.917 v1(60.96,70.917)
NetDEMUX_2_2_14: DEMUX_2_2.14 NOR_2_1.6 | length 37.9
  Bottom Layer w0.254: NOR_2_1.6 32.094,50.558 34.087,50.558 34.646,51.117 34.646,51.993 35.993,53.34 45.06,53.34 45.466,52.934 45.466,52.184 46.584,51.066 63.004,51.066 DEMUX_2_2.14
NetDEMUX_2_2_15: DEMUX_2_2.15 NOR_2_1.3 | length 31.5
  Bottom Layer w0.254: NOR_2_1.3 39.726,52.832 44.806,52.832 44.958,52.68 44.958,51.746 46.146,50.558 65.036,50.558 DEMUX_2_2.15
NetDEMUX_3_1_1: "Main Connector.26" DEMUX_3_1.1 SP8T_Combo_3.10 | length 146.6
  Top Layer w0.254: v1(6.706,18.923) 6.286,19.343 6.286,80.505 SP8T_Combo_3.10
  Bottom Layer w0.254: v1(6.706,18.923) 7.962,17.667 10.502,17.667 12.675,15.494 12.675,13.233 13.259,12.649 17.653,12.649 18.923,11.379 ; SP8T_Combo_3.10 8.611,80.543 15.989,80.543 16.485,80.047 18.402,80.047 19.609,81.255 29.552,81.255 30.328,82.03 45.81,82.03 47.31,80.53 64.504,80.53 DEMUX_3_1.1
NetDEMUX_3_1_2: "Main Connector.25" DEMUX_3_1.2 SP8T_Combo_3.9 | length 164.1
  Top Layer w0.254: SP8T_Combo_3.9 8.865,82.829 7.01,82.829 5.69,81.509 5.69,11.481 8.499,8.672 18.756,8.672 21.463,11.379
  Bottom Layer w0.254: SP8T_Combo_3.9 8.865,82.829 7.01,82.829 6.325,82.144 6.325,81.128 7.442,80.01 15.01,80.01 15.481,79.539 19.775,79.539 19.863,79.628 19.863,80.239 20.371,80.747 30.455,80.747 31.23,81.522 45.302,81.522 47.245,79.578 62.916,79.578 DEMUX_3_1.2
NetDEMUX_3_1_3: "Main Connector.24" DEMUX_3_1.3 SP8T_Combo_3.7 | length 152.7
  Top Layer w0.254: SP8T_Combo_3.7 14.148,80.747 14.148,72.39 13.564,71.806 13.564,66.319 14.148,65.735 14.148,48.26 16.18,46.228 16.18,42.52 18.669,40.03 21.895,40.03 23.216,38.71 23.216,18.567 25.146,16.637 25.146,12.522 24.003,11.379
  Bottom Layer w0.254: SP8T_Combo_3.7 15.9,81.686 17.031,80.555 18.102,80.555 19.355,81.808 29.09,81.808 29.82,82.538 46.292,82.538 49.079,85.326 55.62,85.326 56.786,84.16 69.357,84.16 70.866,82.652 70.866,74.092 65.862,74.092 DEMUX_3_1.3
NetDEMUX_3_1_6: "Main Connector.27" DEMUX_3_1.6 | length 109.9
  Top Layer w0.254: v1(34.696,8.001) 36.601,6.096 48.819,6.096 49.581,6.858 49.581,25.324 53.111,28.854 54.407,28.854 55.626,30.074 55.626,41.504 58.166,44.044 58.166,74.168 DEMUX_3_1.6
  Bottom Layer w0.254: 16.383,11.379 16.383,9.664 18.046,8.001 v1(34.696,8.001)
NetDEMUX_3_1_7: DEMUX_3_1.7 NOR_3_2.11 SPDT_3_2.5 | length 66.3
  Bottom Layer w0.254: SPDT_3_2.5 5.817,88.57 5.817,79.908 6.325,79.4 13.741,79.4 14.402,78.74 14.402,76.962 14.91,76.454 22.987,76.454 23.241,76.708 32.372,76.708 32.868,77.204 34.38,77.204 NOR_3_2.11 36.983,78.867 39.13,76.72 47.954,76.72 50.658,74.016 53.188,74.016 DEMUX_3_1.7
NetDEMUX_3_1_9: DEMUX_3_1.9 NOR_3_2.8 SPDT_3_2.4 | length 165.4
  Bottom Layer w0.254: SPDT_3_2.4 17.221,97.434 70.815,97.434 71.882,96.368 71.882,67.767 70.663,66.548 67.97,66.548 ; NOR_3_2.8 29.554,79.998 31.042,79.998 31.344,80.3 31.344,80.62 31.738,81.014 44.794,81.014 46.737,79.07 62.052,79.07 63.373,77.749 63.373,73.787 68.326,68.834 68.326,66.904 67.97,66.548 ; DEMUX_3_1.9 52.892,66.743 53.146,66.743 ; 53.146,66.743 53.34,66.743 53.535,66.548 ; 53.146,66.743 53.34,66.548 53.535,66.548 ; 53.535,66.548 67.97,66.548
NetDEMUX_3_1_10: DEMUX_3_1.10 NOR_3_2.5 SPDT_3_2.3 | length 71.9
  Top Layer w0.254: NOR_3_2.5 33.503,87.867 37.566,91.93 51.428,91.93 53.086,90.272 53.086,69.088 DEMUX_3_1.10
  Bottom Layer w0.254: SPDT_3_2.3 14.275,89.408 14.275,87.503 15.404,86.373 25.042,86.373 27.518,88.849 31.14,88.849 NOR_3_2.5
NetDEMUX_3_1_11: DEMUX_3_1.11 NOR_3_2.2 SPDT_3_2.2 | length 80.7
  Top Layer w0.254: NOR_3_2.2 41.123,88.558 42.023,89.458 48.294,89.458 48.437,89.315 48.437,82.278 48.768,81.947 48.768,67.818 v1(49.047,67.539)
  Bottom Layer w0.254: SPDT_3_2.2 17.043,92.177 43.155,92.177 44.806,90.526 44.806,85.344 42.266,85.344 NOR_3_2.2 ; v1(49.047,67.539) 50.331,68.822 55.892,68.822 DEMUX_3_1.11
NetDEMUX_3_1_12: DEMUX_3_1.12 NOR_3_1.11 SPDT_3_1.5 | length 65
  Bottom Layer w0.254: SPDT_3_1.5 8.802,77.724 10.072,76.454 11.227,76.454 11.862,75.819 11.862,74.422 13.247,73.037 15.251,73.037 15.771,72.517 20.001,72.517 20.629,73.145 26.213,73.145 26.518,72.84 26.518,67.678 27.889,66.306 29.4,66.306 29.566,66.472 29.566,67.716 30.925,69.076 34.404,69.076 NOR_3_1.11 37.973,69.367 38.456,69.367 38.672,69.584 57.67,69.584 DEMUX_3_1.12
NetDEMUX_3_1_13: DEMUX_3_1.13 NOR_3_1.8 SPDT_3_1.4 | length 68
  Top Layer w0.254: v1(24.359,71.501) NOR_3_1.8
  Bottom Layer w0.254: SPDT_3_1.4 9.322,78.867 7.061,78.867 6.782,78.588 6.782,77.064 7.518,76.327 8.788,76.327 9.322,75.794 9.322,74.422 11.723,72.021 13.906,72.021 14.426,71.501 v1(24.359,71.501) ; NOR_3_1.8 30.861,69.875 37.948,69.875 38.164,70.092 59.702,70.092 DEMUX_3_1.13
NetDEMUX_3_1_14: DEMUX_3_1.14 NOR_3_1.5 SPDT_3_1.3 | length 66.3
  Bottom Layer w0.254: SPDT_3_1.3 13.005,76.581 13.259,76.327 13.868,76.327 14.148,76.048 14.148,74.688 14.783,74.053 15.736,74.053 16.256,73.533 19.26,73.533 20.2,74.473 26.695,74.473 27.508,73.66 32.07,73.66 33.314,72.415 34.417,72.415 35.103,73.101 35.103,73.711 34.366,74.447 34.112,74.447 NOR_3_1.5 34.043,75.598 34.309,75.598 34.9,76.188 36.664,76.188 37.313,75.54 37.313,74.016 38.176,73.152 44.638,73.152 45.134,72.656 60.77,72.656 64.643,68.783 DEMUX_3_1.14
NetDEMUX_3_1_15: DEMUX_3_1.15 NOR_3_1.2 SPDT_3_1.2 | length 63.5
  Top Layer w0.254: v1(23.774,78.714) 23.774,75.717 v1(29.312,70.18) ; v1(38.837,71.12) 38.837,72.771 NOR_3_1.2
  Bottom Layer w0.254: SPDT_3_1.2 16.688,78.867 20.142,78.867 20.295,78.714 v1(23.774,78.714) ; v1(29.312,70.18) 29.515,70.383 37.44,70.383 38.176,71.12 v1(38.837,71.12) ; NOR_3_1.2 42.469,73.711 48.108,73.711 48.654,73.164 61.71,73.164 DEMUX_3_1.15
NetDEMUX_3_2_1: "Main Connector.21" DEMUX_3_2.1 SP8T_Combo_3.2 | length 181.5
  Top Layer w0.254: SP8T_Combo_3.2 12.307,87.007 5.639,87.007 4.166,85.534 4.166,8.534 5.639,7.061 24.587,7.061 v1(26.695,9.169)
  Bottom Layer w0.254: SP8T_Combo_3.2 16.219,85.357 18.771,85.357 19.788,84.34 44.189,84.34 44.618,84.769 45.263,84.769 45.822,85.328 45.822,87.224 52.045,93.447 66.065,93.447 DEMUX_3_2.1 ; v1(26.695,9.169) 29.413,9.169 31.623,11.379
NetDEMUX_3_2_2: "Main Connector.22" DEMUX_3_2.2 SP8T_Combo_3.3 | length 185.2
  Top Layer w0.254: SP8T_Combo_3.3 10.783,85.991 7.607,85.991 5.182,83.566 5.182,9.474 6.492,8.164 21.829,8.164 v1(22.897,9.232)
  Bottom Layer w0.254: SP8T_Combo_3.3 11.862,84.912 11.862,91.288 14.529,93.955 69.647,93.955 70.866,92.735 70.866,88.646 68.326,88.646 DEMUX_3_2.2 ; v1(22.897,9.232) 23.851,10.185 27.889,10.185 29.083,11.379
NetDEMUX_3_2_3: "Main Connector.23" DEMUX_3_2.3 SP8T_Combo_3.4 | length 174.1
  Top Layer w0.254: SP8T_Combo_3.4 11.151,83.083 13.106,83.083 13.691,83.668 13.691,84.709 11.901,86.499 6.286,86.499 4.674,84.887 4.674,9.195 6.213,7.656 23.796,7.656 25.677,9.536 25.677,10.513 26.543,11.379
  Bottom Layer w0.254: SP8T_Combo_3.4 11.188,83.046 28.296,83.046 28.804,83.554 44.314,83.554 45.022,84.261 46.279,84.261 48.359,86.342 61.196,86.342 DEMUX_3_2.3
NetDEMUX_3_2_6: "Main Connector.28" DEMUX_3_2.6 | length 146.7
  Top Layer w0.254: DEMUX_3_2.6 63.373,83.439 63.373,74.422 68.58,69.215 v1(68.58,7.087)
  Bottom Layer w0.254: 13.843,11.379 21.438,3.785 65.278,3.785 v1(68.58,7.087)
NetDEMUX_3_2_7: DEMUX_3_2.7 NOR_3_2.12 | length 30.5
  Top Layer w0.254: DEMUX_3_2.7 55.626,88.646 v1(55.626,77.966)
  Bottom Layer w0.254: NOR_3_2.12 39.714,77.736 50.026,77.736 50.8,76.962 52.832,76.962 53.836,77.966 v1(55.626,77.966)
NetDEMUX_3_2_9: DEMUX_3_2.9 NOR_3_2.9 | length 27.6
  Top Layer w0.254: v1(51.816,77.978) 51.816,82.042 DEMUX_3_2.9
  Bottom Layer w0.254: NOR_3_2.9 30.963,79.299 31.852,79.299 31.852,80.112 32.246,80.506 43.739,80.506 45.759,78.486 51.308,78.486 v1(51.816,77.978)
NetDEMUX_3_2_10: DEMUX_3_2.10 NOR_3_2.6 | length 32.8
  Top Layer w0.254: v1(42.164,87.884) 47.295,87.884 47.904,87.274 47.904,82.525 v1(47.422,82.042)
  Bottom Layer w0.254: NOR_3_2.6 32.094,85.356 34.087,85.356 34.646,85.915 34.646,87.173 35.357,87.884 v1(42.164,87.884) ; v1(47.422,82.042) 48.426,81.038 53.352,81.038 DEMUX_3_2.10
NetDEMUX_3_2_11: DEMUX_3_2.11 NOR_3_2.3 | length 32.9
  Top Layer w0.254: NOR_3_2.3 38.583,87.364 42.133,90.914 47.872,90.914 48.945,89.841 48.945,83.116 v1(49.784,82.278)
  Bottom Layer w0.254: v1(49.784,82.278) 48.945,83.116 48.945,84.436 49.327,84.818 50.978,84.818 51.987,83.808 55.384,83.808 DEMUX_3_2.11
NetDEMUX_3_2_12: DEMUX_3_2.12 NOR_3_1.12 | length 36.7
  Top Layer w0.254: v1(52.324,65.888) 54.61,65.888 55.626,66.904 55.626,76.048 59.563,79.985 DEMUX_3_2.12
  Bottom Layer w0.254: NOR_3_1.12 39.25,68.104 39.25,68.667 39.659,69.076 44.97,69.076 48.158,65.888 v1(52.324,65.888)
NetDEMUX_3_2_13: DEMUX_3_2.13 NOR_3_1.9 | length 60.2
  Top Layer w0.254: DEMUX_3_2.13 60.96,81.026 60.96,74.168 65.786,69.342 v1(65.786,65.38)
  Bottom Layer w0.254: NOR_3_1.9 32.094,68.568 34.087,68.568 34.634,68.021 34.634,66.904 35.243,66.294 39.167,66.294 39.726,66.853 39.726,67.869 40.425,68.568 41.973,68.568 42.393,68.148 42.393,66.878 43.231,66.04 46.082,66.04 47.25,64.872 65.278,64.872 v1(65.786,65.38)
NetDEMUX_3_2_14: DEMUX_3_2.14 NOR_3_1.6 | length 58.3
  Top Layer w0.254: v1(33.884,73.431) 34.646,74.193 34.646,87.104 38.964,91.422 48.354,91.422 49.962,89.814 v1(49.962,83.795)
  Bottom Layer w0.254: NOR_3_1.6 31.852,74.168 32.261,74.168 32.326,74.103 32.879,74.103 33.551,73.431 v1(33.884,73.431) ; v1(49.962,83.795) 50.456,83.3 54.978,83.3 55.626,82.652 55.626,81.636 56.224,81.038 63.512,81.038 DEMUX_3_2.14
NetDEMUX_3_2_15: DEMUX_3_2.15 NOR_3_1.3 | length 45.7
  Top Layer w0.254: NOR_3_1.3 39.726,76.2 39.726,79.502 v1(46.838,86.614) ; v1(66.04,87.02) 67.183,85.877 DEMUX_3_2.15
  Bottom Layer w0.254: v1(46.838,86.614) 47.092,86.868 60.935,86.868 63.373,89.306 63.373,90.272 64.389,91.288 65.024,91.288 66.04,90.272 v1(66.04,87.02)
"NetMain Connector_14": "Main Connector.14" SP3T_1.2 | length 35.8
  Bottom Layer w0.254: 11.303,13.919 8.564,16.659 7.099,16.659 5.69,18.068 5.69,37.625 9.212,41.148 10.897,41.148 SP3T_1.2
"NetMain Connector_15": "Main Connector.15" SP3T_1.3 | length 32.3
  Bottom Layer w0.254: 8.763,13.919 5.182,17.501 5.182,37.973 SP3T_1.3
"NetMain Connector_29": "Main Connector.29" SP3T_2.2 | length 258.4
  Bottom Layer w0.254: 11.303,11.379 18.898,3.785 71.247,3.785 72.39,4.928 72.39,96.368 71.222,97.536 10.135,97.536 4.801,92.202 4.801,68.936 6.02,67.716 10.109,67.716 SP3T_2.2
"NetMain Connector_30": "Main Connector.30" SP3T_2.3 | length 60.7
  Top Layer w0.254: 8.763,11.379 7.62,12.522 7.62,17.551 7.722,17.653 7.722,21.272 6.794,22.2 6.794,26.378 9.144,28.728 9.144,38.786 8.814,39.116 8.814,46.761 9.068,47.015 9.068,69.215 SP3T_2.3
NetNOR_1_1_1: NOR_1_1.1 SPDT_1_1.7 | length 34.5
  Top Layer w0.254: v1(43.561,24.384) 43.561,28.727 NOR_1_1.1
  Bottom Layer w0.254: SPDT_1_1.7 16.383,22.733 16.383,22.161 16.942,21.602 19.005,21.602 20.251,22.848 32.437,22.848 33.453,23.864 43.041,23.864 v1(43.561,24.384)
NetNOR_1_1_4: NOR_1_1.4 SPDT_1_1.8 | length 28
  Top Layer w0.254: v1(35.916,25.552) 35.916,28.702 NOR_1_1.4
  Bottom Layer w0.254: SPDT_1_1.8 13.005,23.698 14.224,23.698 14.402,23.876 20.295,23.876 21.336,24.917 35.281,24.917 v1(35.916,25.552)
NetNOR_1_1_10: NOR_1_1.10 SPDT_1_1.9 | length 24.7
  Bottom Layer w0.254: SPDT_1_1.9 12.104,21.094 19.418,21.094 20.664,22.34 32.372,22.34 NOR_1_1.10
NetNOR_1_1_13: NOR_1_1.13 SPDT_1_1.10 | length 47.9
  Bottom Layer w0.254: SPDT_1_1.10 7.925,23.609 9.056,24.74 9.056,25.756 8.395,26.416 7.163,26.416 6.274,25.527 6.274,21.311 8.687,18.898 38.811,18.898 NOR_1_1.13
NetNOR_1_2_1: NOR_1_2.1 SPDT_1_2.7 | length 30
  Bottom Layer w0.254: SPDT_1_2.7 16.688,36.576 22.784,36.576 23.724,37.516 41.173,37.516 NOR_1_2.1
NetNOR_1_2_4: NOR_1_2.4 SPDT_1_2.8 | length 27.1
  Bottom Layer w0.254: SPDT_1_2.8 14.275,36.703 14.275,38.608 15.748,40.081 26.06,40.081 27.28,38.862 34.9,38.862 NOR_1_2.4
NetNOR_1_2_10: NOR_1_2.10 SPDT_1_2.9 | length 35.7
  Top Layer w0.254: v1(21.26,41.605) 24.232,38.633 v1(24.232,36.5) ; NOR_1_2.10 v1(33.503,36.5)
  Bottom Layer w0.254: SPDT_1_2.9 11.786,36.754 11.786,41.173 12.217,41.605 v1(21.26,41.605) ; v1(24.232,36.5) v1(33.503,36.5)
NetNOR_1_2_13: NOR_1_2.13 SPDT_1_2.10 | length 36.6
  Bottom Layer w0.254: SPDT_1_2.10 8.826,34.532 8.826,34.392 9.423,33.794 19.724,33.794 20.22,34.29 29.106,34.29 29.693,34.877 40.637,34.877 41.123,34.392 NOR_1_2.13
NetNOR_2_1_1: NOR_2_1.1 SPDT_2_1.7 | length 99.9
  Top Layer w0.254: v1(17.958,46.99) 18.948,46.99 21.082,49.124 21.082,55.063 21.895,55.876 21.895,82.474 27.153,87.732 28.829,87.732 29.82,86.741 29.82,73.254 v1(30.988,72.085) ; v1(42.52,72.085) 42.52,52.832 NOR_2_1.1
  Bottom Layer w0.254: SPDT_2_1.7 16.307,48.641 v1(17.958,46.99) ; v1(30.988,72.085) 31.674,71.399 36.424,71.399 37.668,72.644 41.961,72.644 v1(42.52,72.085)
NetNOR_2_1_4: NOR_2_1.4 SPDT_2_1.8 | length 27.1
  Bottom Layer w0.254: SPDT_2_1.8 14.402,50.038 14.402,51.664 15.062,52.324 25.514,52.324 27.28,50.558 31.14,50.558 31.648,50.05 34.404,50.05 NOR_2_1.4
NetNOR_2_1_10: NOR_2_1.10 SPDT_2_1.9 | length 35.2
  Bottom Layer w0.254: SPDT_2_1.9 9.322,49.784 7.442,49.784 6.782,49.124 6.782,47.93 8.611,46.101 15.43,46.101 16.573,44.958 19.38,44.958 20.523,46.101 32.066,46.101 32.602,45.565 32.602,44.97 NOR_2_1.10
NetNOR_2_1_13: NOR_2_1.13 SPDT_2_1.10 | length 36
  Bottom Layer w0.254: SPDT_2_1.10 9.564,47.002 15.507,47.002 17.043,45.466 18.872,45.466 20.027,46.621 32.32,46.621 33.231,45.71 39.482,45.71 NOR_2_1.13
NetNOR_2_2_1: NOR_2_2.1 SPDT_2_2.7 | length 41.4
  Bottom Layer w0.254: SPDT_2_2.7 14.922,62.218 14.065,62.218 13.418,62.865 12.395,62.865 11.862,62.332 11.862,60.266 12.68,59.448 32.36,59.448 34.634,61.722 37.44,61.722 38.964,60.198 40.742,60.198 NOR_2_2.1
NetNOR_2_2_4: NOR_2_2.4 SPDT_2_2.8 | length 25
  Bottom Layer w0.254: SPDT_2_2.8 14.644,59.956 31.941,59.956 34.313,62.329 35.252,62.329 NOR_2_2.4
NetNOR_2_2_10: NOR_2_2.10 SPDT_2_2.9 | length 29.3
  Top Layer w0.254: NOR_2_2.10 33.503,58.674 v1(33.999,59.17)
  Bottom Layer w0.254: SPDT_2_2.9 10.465,60.731 12.522,58.674 33.503,58.674 v1(33.999,59.17)
NetNOR_2_2_13: NOR_2_2.13 SPDT_2_2.10 | length 110.7
  Top Layer w0.254: v1(23.622,95.352) v1(29.083,89.891) ; v1(39.065,89.891) 37.44,88.265 37.44,61.722 38.151,61.011 39.294,61.011 41.123,59.182 NOR_2_2.13
  Bottom Layer w0.254: SPDT_2_2.10 5.537,61.595 4.293,62.84 4.293,94.844 4.801,95.352 v1(23.622,95.352) ; v1(29.083,89.891) v1(39.065,89.891)
NetNOR_3_1_1: NOR_3_1.1 SPDT_3_1.7 | length 30.4
  Bottom Layer w0.254: SPDT_3_1.7 16.676,74.053 19.062,74.053 20.371,75.362 25.425,75.362 26.264,76.2 34.087,76.2 34.583,76.696 37.68,76.696 38.176,76.2 42.52,76.2 NOR_3_1.1
NetNOR_3_1_4: NOR_3_1.4 SPDT_3_1.8 | length 27.9
  Bottom Layer w0.254: SPDT_3_1.8 13.005,74.205 13.665,73.545 15.482,73.545 16.002,73.025 19.736,73.025 20.371,73.66 26.518,73.66 27.026,73.152 31.648,73.152 32.893,71.907 34.823,71.907 36.043,73.127 NOR_3_1.4
NetNOR_3_1_10: NOR_3_1.10 SPDT_3_1.9 | length 30.7
  Bottom Layer w0.254: SPDT_3_1.9 11.266,74.016 12.753,72.529 14.358,72.529 14.878,72.009 23.304,72.009 23.825,72.53 24.943,72.53 26.01,71.463 26.01,67.17 27.381,65.798 29.856,65.798 30.34,66.282 32.348,66.282 NOR_3_1.10
NetNOR_3_1_13: NOR_3_1.13 SPDT_3_1.10 | length 38.3
  Bottom Layer w0.254: SPDT_3_1.10 8.726,74.016 11.229,71.513 13.398,71.513 13.918,70.993 20.573,70.993 26.276,65.29 30.364,65.29 30.848,65.774 39.46,65.774 NOR_3_1.13
NetNOR_3_2_1: NOR_3_2.1 SPDT_3_2.7 | length 33.5
  Bottom Layer w0.254: SPDT_3_2.7 16.801,86.881 23.585,86.881 27.634,90.931 41.452,90.931 43.663,88.72 NOR_3_2.1
NetNOR_3_2_4: NOR_3_2.4 SPDT_3_2.8 | length 25.6
  Bottom Layer w0.254: SPDT_3_2.8 13.005,87.214 14.353,85.865 19.157,85.865 20.174,84.848 34.404,84.848 NOR_3_2.4
NetNOR_3_2_10: NOR_3_2.10 SPDT_3_2.9 | length 39.9
  Top Layer w0.254: SPDT_3_2.9 11.735,89.408 11.735,91.313 12.243,91.821 19.228,91.821 19.812,91.237 19.812,78.384 v1(20.726,77.47)
  Bottom Layer w0.254: v1(20.726,77.47) 20.98,77.216 31.852,77.216 NOR_3_2.10
NetNOR_3_2_13: NOR_3_2.13 SPDT_3_2.10 | length 54
  Top Layer w0.254: SPDT_3_2.10 6.782,89.281 6.782,91.288 8.255,92.761 19.863,92.761 20.879,91.745 v1(20.879,79.731)
  Bottom Layer w0.254: v1(20.879,79.731) 21.031,79.883 25.425,79.883 27.584,77.724 31.547,77.724 32.36,78.537 32.36,79.604 32.754,79.998 39.992,79.998 NOR_3_2.13
VCC: NOR_1_1.14 NOR_1_2.14 NOR_2_1.14 NOR_2_2.14 NOR_3_1.14 NOR_3_2.14 | length 62.3
  Top Layer w0.254: NOR_1_1.14 44.806,22.352 44.806,31.242 NOR_1_2.14 44.806,33.528 44.806,42.926 NOR_2_1.14 43.663,46.484 43.857,47.515 44.806,48.463 44.806,54.356 NOR_2_2.14 44.806,56.642 44.806,66.294 NOR_3_1.14 44.806,68.58 44.806,77.724 NOR_3_2.14

## Text inside footprints (layer, text, board x,y; h text height)
"Main Connector": Top Overlay "30" at 7.239,11.887 h1.27 r180; Top Overlay "15" at 7.239,14.427 h1.27 r180; Top Overlay "1" at 46.863,14.427 h1.27 r180; Top Overlay "16" at 47.879,11.887 h1.27 r180
SP8T_Combo_1: Top Overlay "6" at 20.523,29.515 h1.27 r180; Top Overlay "10" at 6.299,29.515 h1.27 r180; Top Overlay "5" at 6.299,32.055 h1.27 r180; Top Overlay "1" at 20.523,32.055 h1.27 r180
SP8T_Combo_2: Top Overlay "6" at 20.523,55.347 h1.27 r180; Top Overlay "10" at 6.299,55.347 h1.27 r180; Top Overlay "5" at 6.299,57.887 h1.27 r180; Top Overlay "1" at 20.523,57.887 h1.27 r180
SP8T_Combo_3: Top Overlay "6" at 20.168,82.194 h1.27 r180; Top Overlay "10" at 5.944,82.194 h1.27 r180; Top Overlay "5" at 5.944,84.734 h1.27 r180; Top Overlay "1" at 20.168,84.734 h1.27 r180
SPDT_1_1: Top Overlay "6" at 20.625,23.241 h1.27 r180; Top Overlay "10" at 6.401,23.241 h1.27 r180; Top Overlay "5" at 6.401,25.781 h1.27 r180; Top Overlay "1" at 20.625,25.781 h1.27 r180
SPDT_1_2: Top Overlay "6" at 20.625,35.941 h1.27 r180; Top Overlay "10" at 6.401,35.941 h1.27 r180; Top Overlay "5" at 6.401,38.481 h1.27 r180; Top Overlay "1" at 20.625,38.481 h1.27 r180
SPDT_2_1: Top Overlay "6" at 20.625,49.149 h1.27 r180; Top Overlay "10" at 6.401,49.149 h1.27 r180; Top Overlay "5" at 6.401,51.689 h1.27 r180; Top Overlay "1" at 20.625,51.689 h1.27 r180
SPDT_2_2: Top Overlay "6" at 20.625,62.103 h1.27 r180; Top Overlay "10" at 6.401,62.103 h1.27 r180; Top Overlay "5" at 6.401,64.643 h1.27 r180; Top Overlay "1" at 20.625,64.643 h1.27 r180
SPDT_3_1: Top Overlay "6" at 20.625,75.692 h1.27 r180; Top Overlay "10" at 6.401,75.692 h1.27 r180; Top Overlay "5" at 6.401,78.232 h1.27 r180; Top Overlay "1" at 20.625,78.232 h1.27 r180
SPDT_3_2: Top Overlay "6" at 20.625,88.646 h1.27 r180; Top Overlay "10" at 6.401,88.646 h1.27 r180; Top Overlay "5" at 6.401,91.186 h1.27 r180; Top Overlay "1" at 20.625,91.186 h1.27 r180